# EAGLE board naked_othermill (EAGLE 7.4.0)
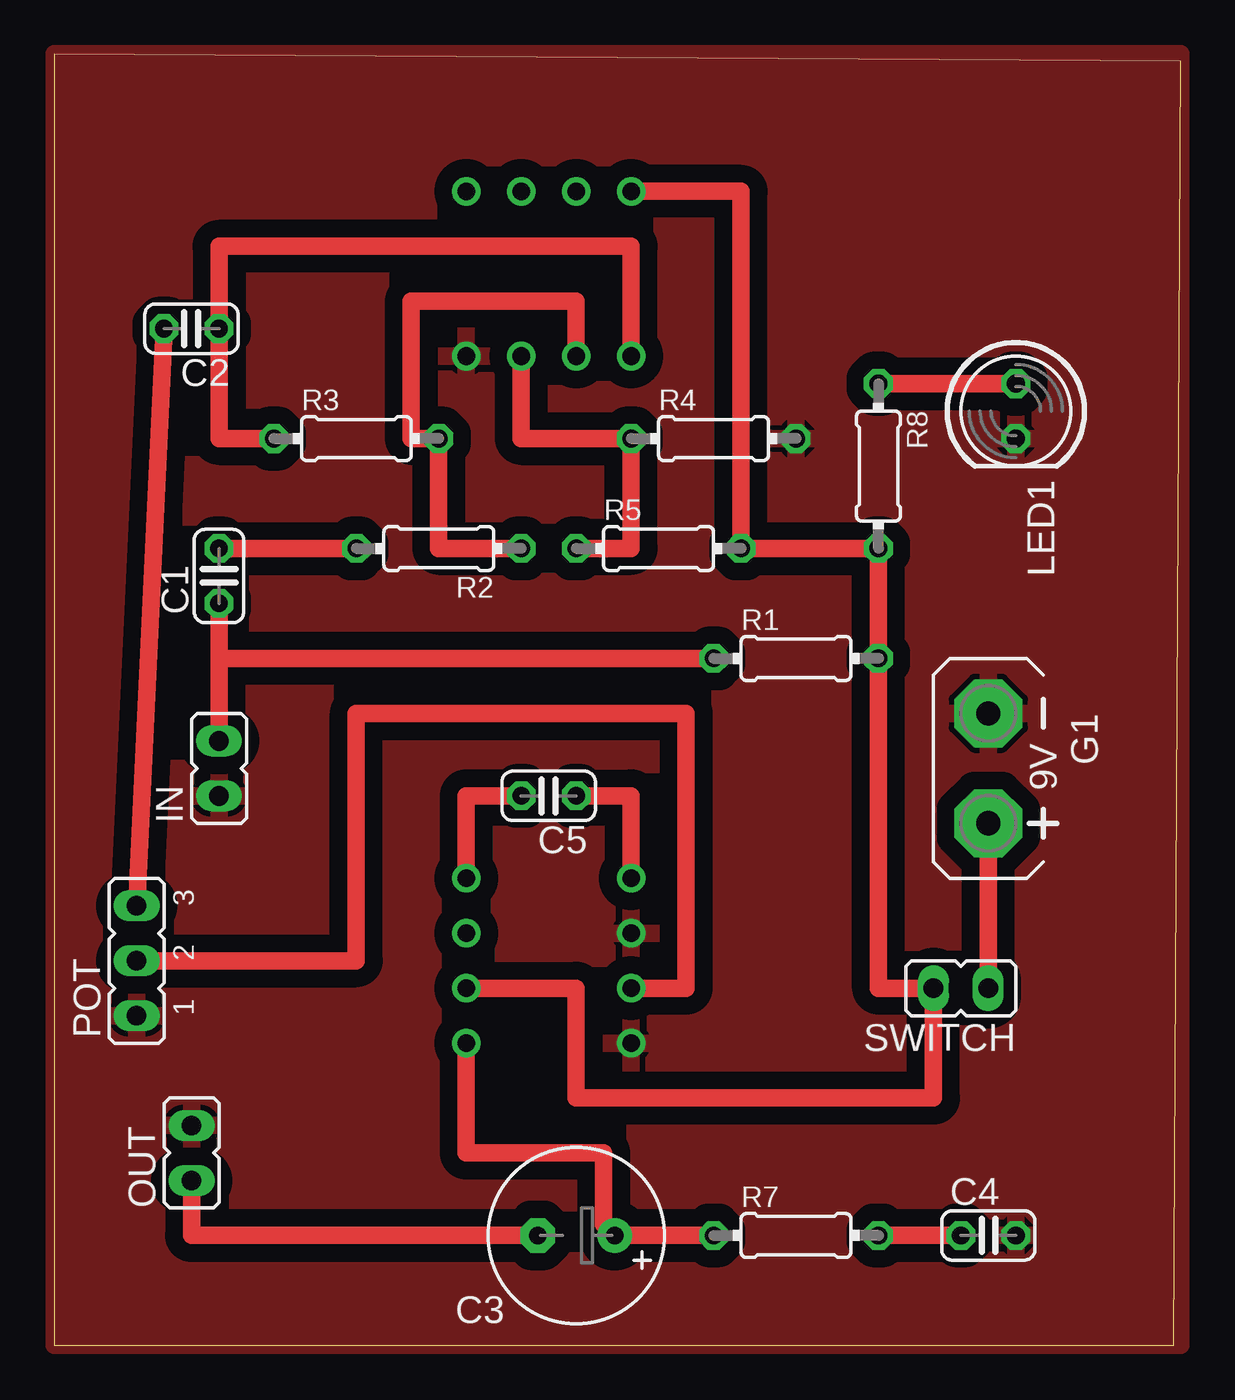
[diagram p0: board, top side]
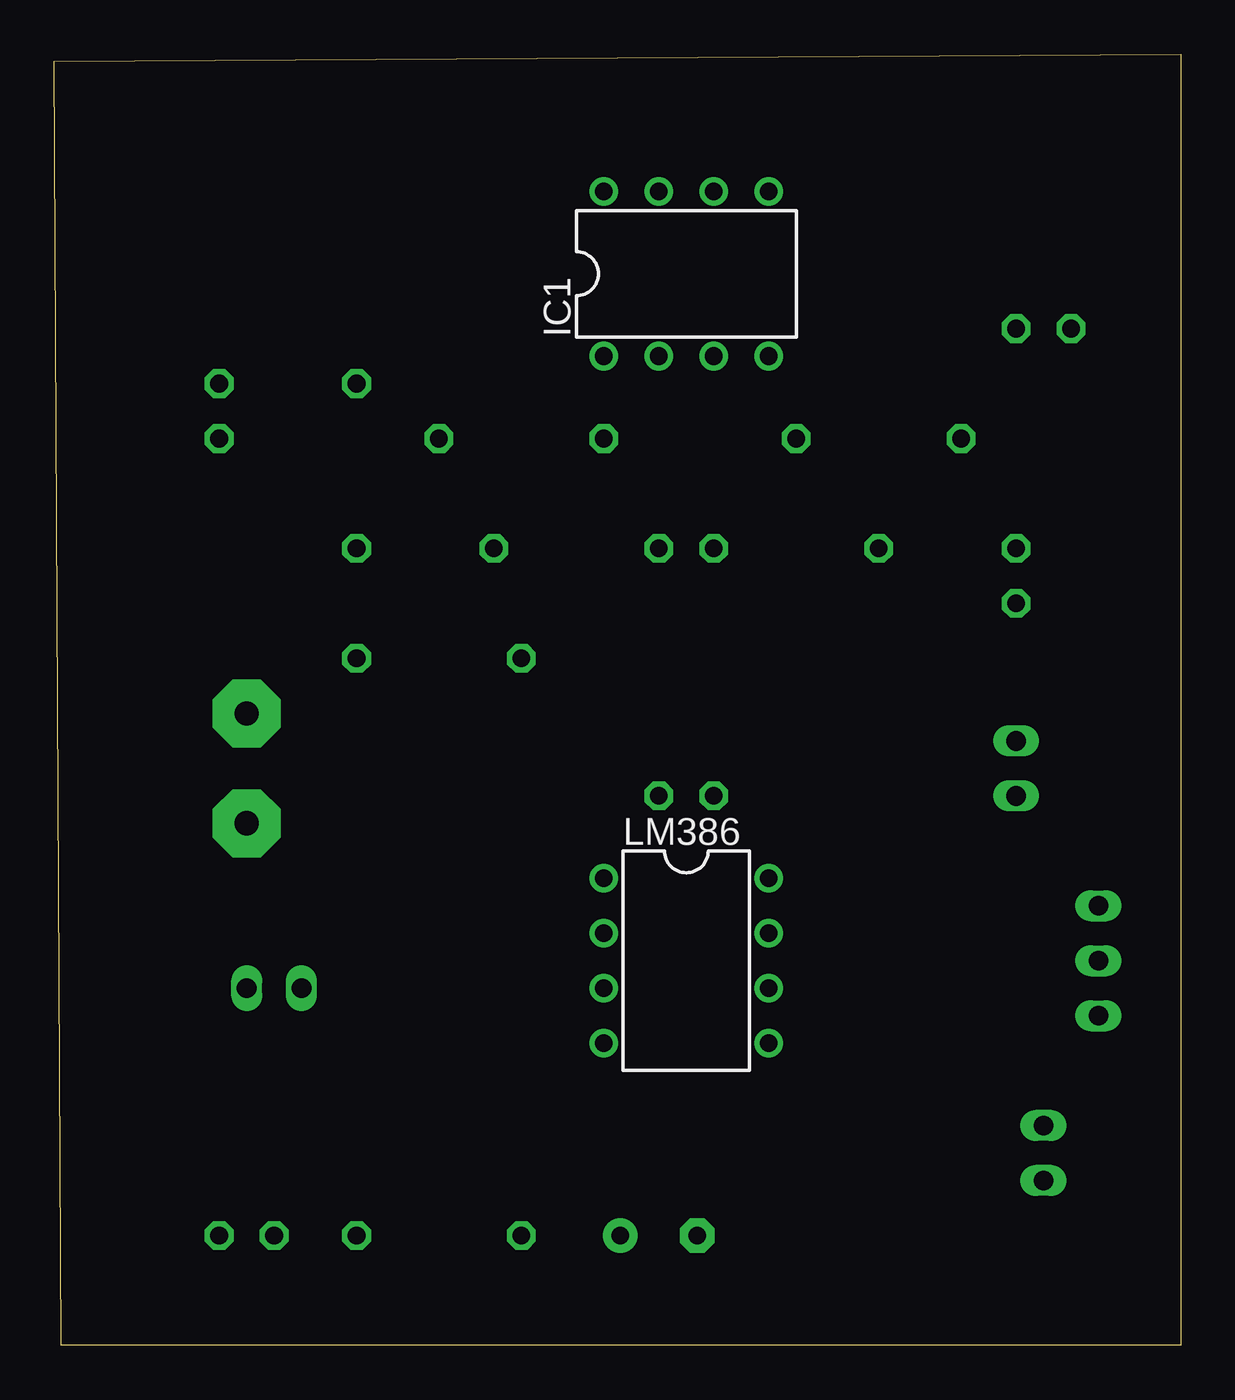
[diagram p1: board, bottom side, seen from below]

Size 52.08 x 59.68 mm. Coordinates in mm from the lower left corner, seen from the top.
Outline: 0,0 51.74,0 52.08,59.36 0,59.68 0,0
Copper layers (1*16): Top 0.035mm / dielectric 1.5mm / Bottom 0.035mm
Design rules "Othermill-DRC-1-32": minimum track width 8mil, minimum drill 0.8mm, track to track 0.794003125mm, track to pad 0.794003125mm, pad to pad 0.794003125mm, via to via 0.794003125mm, smd to smd 0mil, copper to edge 0mil, drill to drill 1mil, minimum pad ring 10mil, minimum via ring 10mil, stop-mask expansion 1mil, vias tented up to drill 30mil, thermal gap 10mil

## Footprints (pad centres in the part's own frame; a part is rotated, then mirrored left to right if it is on the bottom)
C025-024X044 = drill 0.813 octagon: 1 -1.27,0; 2 1.27,0
E3,5-8 = drill 0.813 pad 1.6: + -1.778,0 | drill 0.813 pad 1.6 octagon: - 1.778,0
AB9V = drill 1.118 pad 3.15 octagon: + 0,2.54; - 0,-2.54
DIL08 = drill 0.813 pad 1.27: 1 -3.81,-3.81; 2 -1.27,-3.81; 3 1.27,-3.81; 4 3.81,-3.81; 5 3.81,3.81; 6 1.27,3.81; 7 -1.27,3.81; 8 -3.81,3.81
JP1 = drill 0.914 long: 1 0,-1.27; 2 0,1.27
LED5MM = drill 0.813 octagon: A -1.27,0; K 1.27,0
JP2 = drill 0.914 long: 1 -2.54,0; 2 0,0; 3 2.54,0
0204/7 = drill 0.813 octagon: 1 -3.81,0; 2 3.81,0

## Placement (x,y rotation side)
C1  .1uF  [C025-024X044]  7.62,35.56 90 top
C2  .1uF  [C025-024X044]  6.35,46.99 180 top
C3  220uF  [E3,5-8]  24.13,5.08 180 top
C4  .1uF  [C025-024X044]  43.18,5.08 0 top
C5  10uF  [C025-024X044]  22.86,25.4 180 top
G1  AB9V  [AB9V]  43.18,26.67 180 top
IC1  LM358N  [DIL08]  22.86,49.53 0 bottom
IN  [JP1]  7.62,26.67 0 top
LED1  [LED5MM]  44.45,43.18 270 top
LM386  LM386N-1  [DIL08]  22.86,17.78 270 bottom
OUT  [JP1]  6.35,8.89 0 top
POT  10k  [JP2]  3.81,17.78 90 top
R1  22K  [0204/7]  34.29,31.75 0 top
R2  1K  [0204/7]  17.78,36.83 180 top
R3  10K  [0204/7]  13.97,41.91 0 top
R4  10K  [0204/7]  30.48,41.91 0 top
R5  10K  [0204/7]  27.94,36.83 0 top
R7  10  [0204/7]  34.29,5.08 0 top
R8  1k  [0204/7]  38.1,40.64 270 top
SWITCH  [JP1]  41.91,16.51 90 top

## Library data of the parts
C1 C2 C4 C5 R1-R5 R7 R8 = resistor
C3 = rcl
G1 = battery
IC1 LM386 = linear
IN OUT POT SWITCH = jumper
LED1 = led

## Nets
9V: IC1.8 LM386.6 R1.2 R5.2 R8.2 SWITCH.2
GND: C4.2 G1.- IC1.4 IN.1 LED1.K LM386.2 LM386.4 OUT.2 POT.1 R4.2
N$1: G1.+ SWITCH.1
N$2: C1.1 IN.2 R1.1
N$3: C1.2 R2.2
N$4: IC1.2 R2.1 R3.2
N$5: C5.1 LM386.1
N$6: IC1.3 R4.1 R5.1
N$7: C2.1 IC1.1 R3.1
N$8: C2.2 POT.3
N$9: LM386.3 POT.2
N$10: C3.+ LM386.5 R7.1
N$11: C3.- OUT.1
N$12: LED1.A R8.1
N$13: C4.1 R7.2
N$14: C5.2 LM386.8

## Tracks (layer width: path | path; a pad name or v marks a point on that pad's centre or on a via)
9V
  Top 0.813: IC1.8 31.75,53.34 R5.2 R8.2 R1.2 38.1,16.51 SWITCH.2 40.64,11.43 24.13,11.43 24.13,16.51 LM386.6
GND
  pour Top (isolate 0.813): 0,0 0,59.69 52.07,59.69 52.07,0
N$1
  Top 0.813: SWITCH.1 G1.+
N$2
  Top 0.813: IN.2 7.62,31.75 | 7.62,31.75 C1.1 | R1.1 7.62,31.75
N$3
  Top 0.813: C1.2 R2.2
N$4
  Top 0.813: R2.1 17.78,36.83 R3.2 16.51,41.91 16.51,48.26 24.13,48.26 IC1.2
N$5
  Top 0.813: C5.1 26.67,25.4 LM386.1
N$6
  Top 0.813: R5.1 26.67,36.83 R4.1 21.59,41.91 IC1.3
N$7
  Top 0.813: R3.1 7.62,41.91 C2.1 7.62,50.8 26.67,50.8 IC1.1
N$8
  Top 0.813: C2.2 POT.3
N$9
  Top 0.813: POT.2 13.97,17.78 13.97,29.21 29.21,29.21 29.21,16.51 LM386.3
N$10
  Top 0.813: R7.1 C3.+ 25.4,5.59 25.4,8.89 19.05,8.89 LM386.5
N$11
  Top 0.813: OUT.1 6.35,5.08 C3.-
N$12
  Top 0.813: R8.1 LED1.A
N$13
  Top 0.813: R7.2 C4.1
N$14
  Top 0.813: C5.2 19.05,25.4 LM386.8